# EAGLE board ratty (EAGLE 8.0.0)
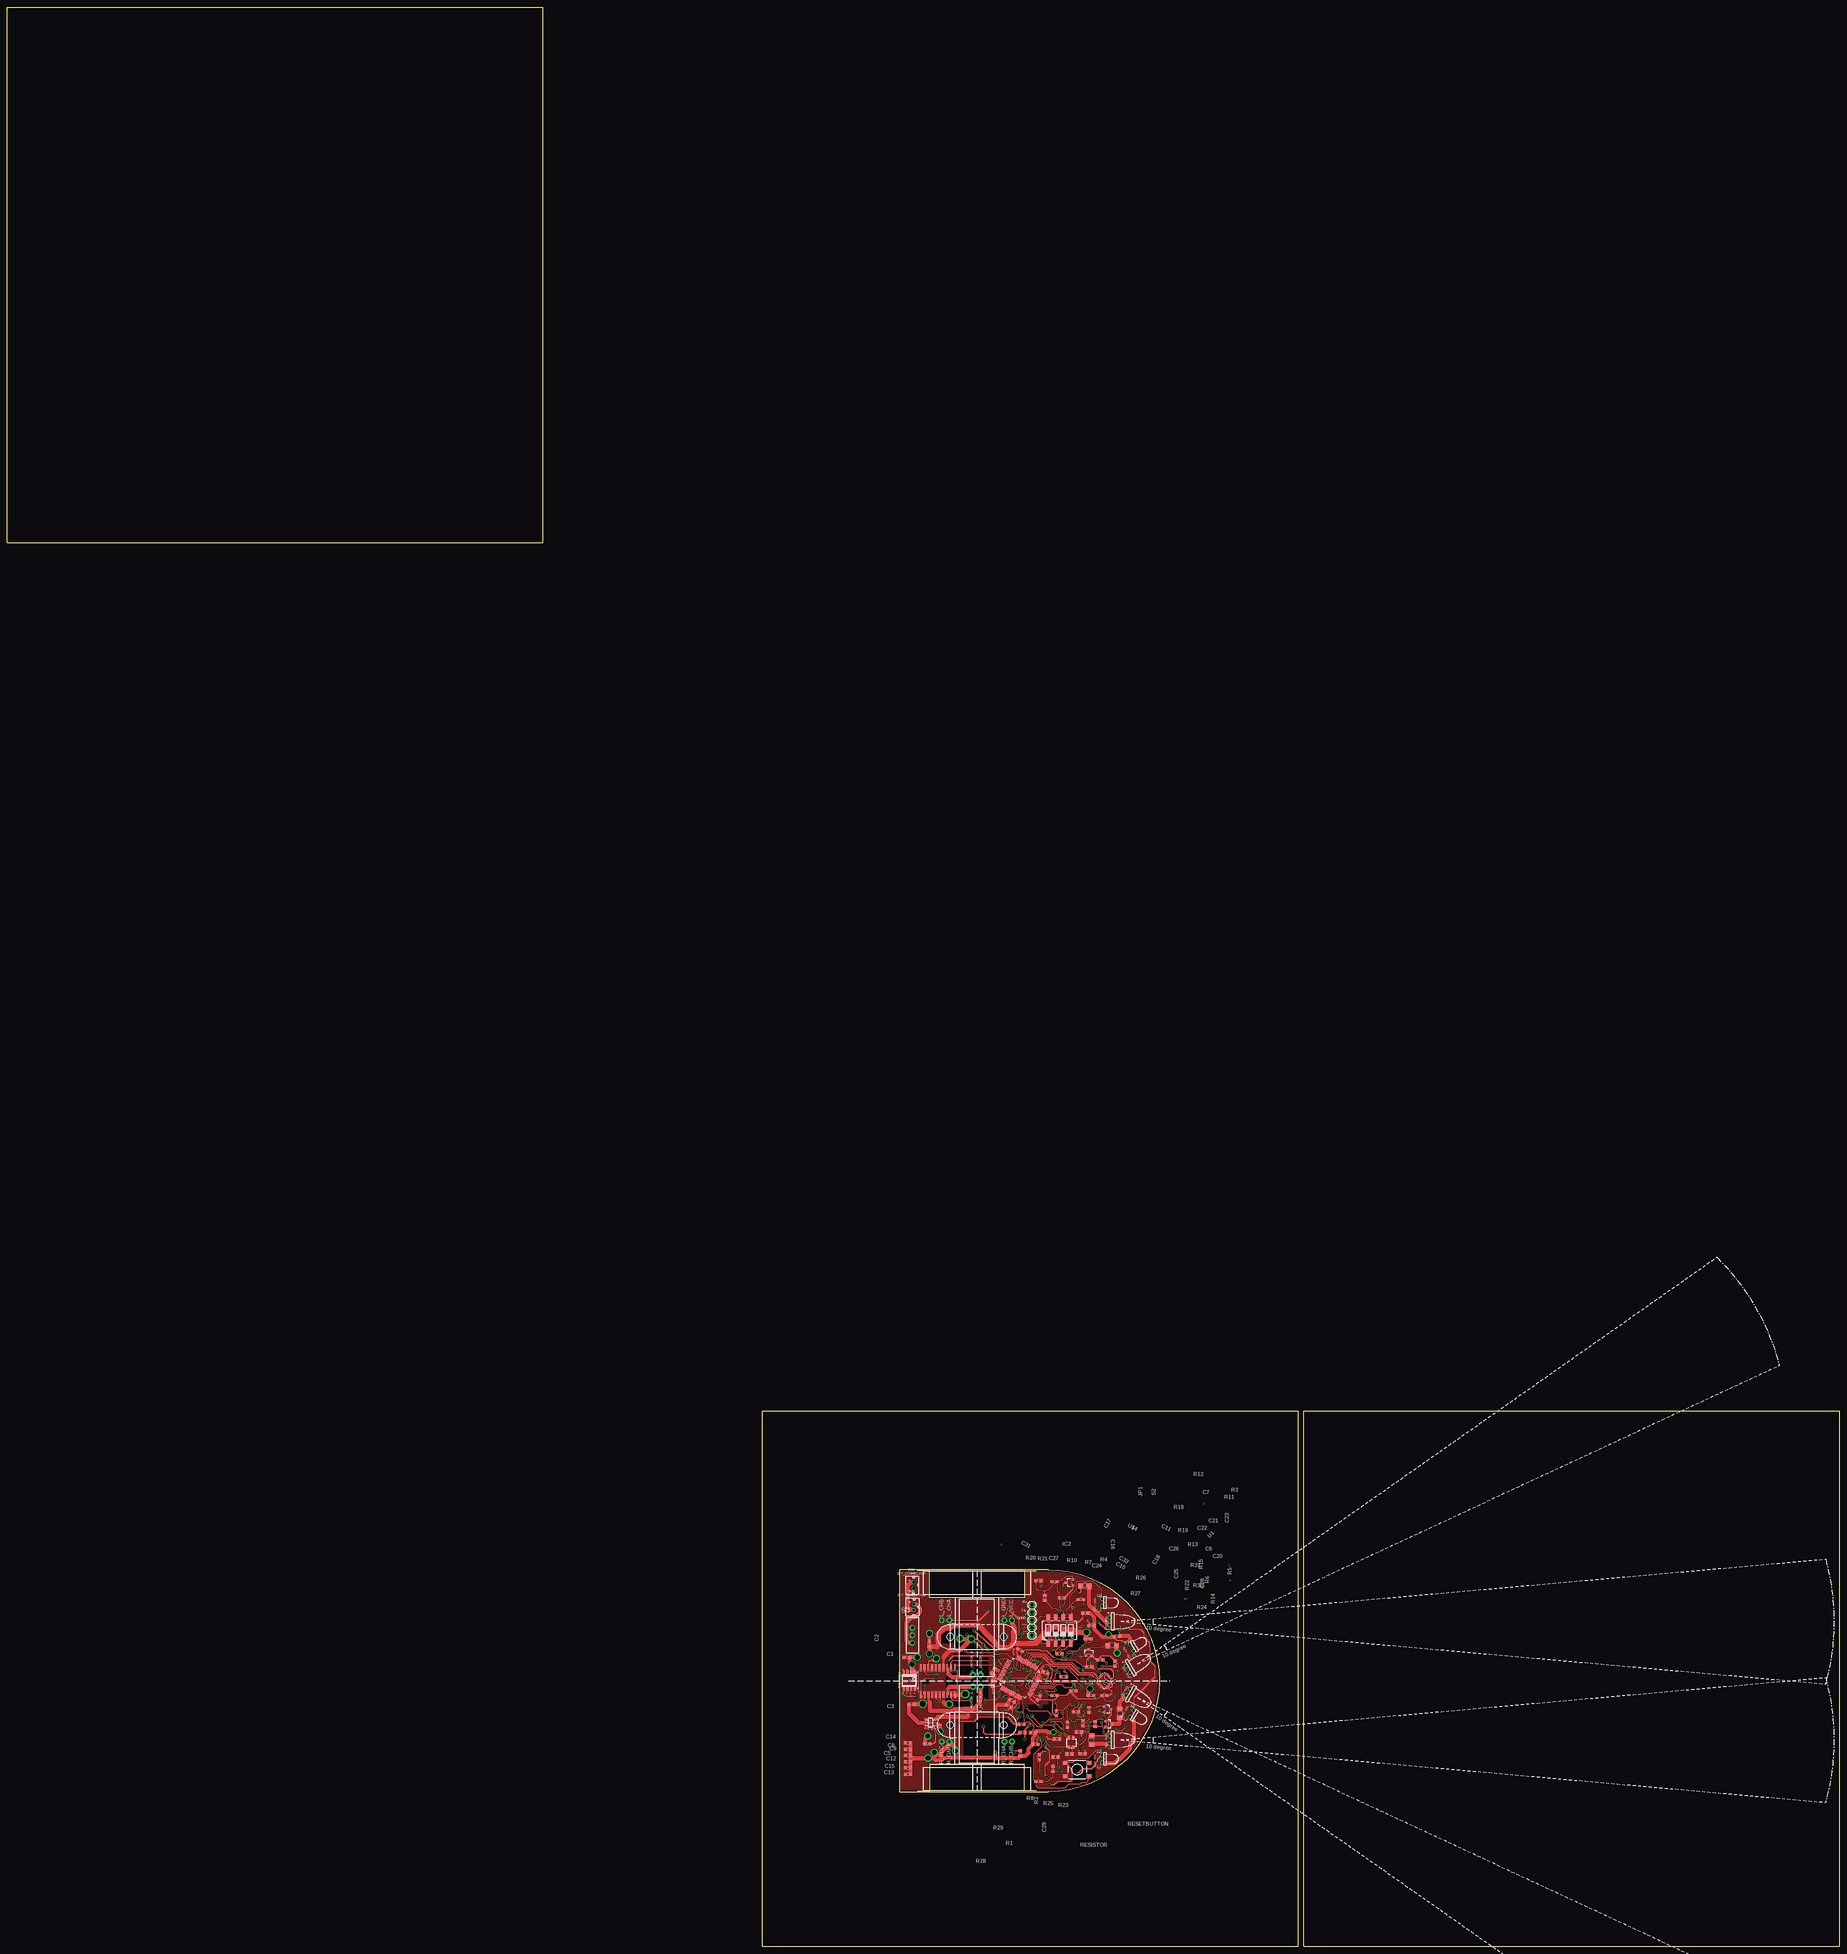
[diagram p0: board, top side]
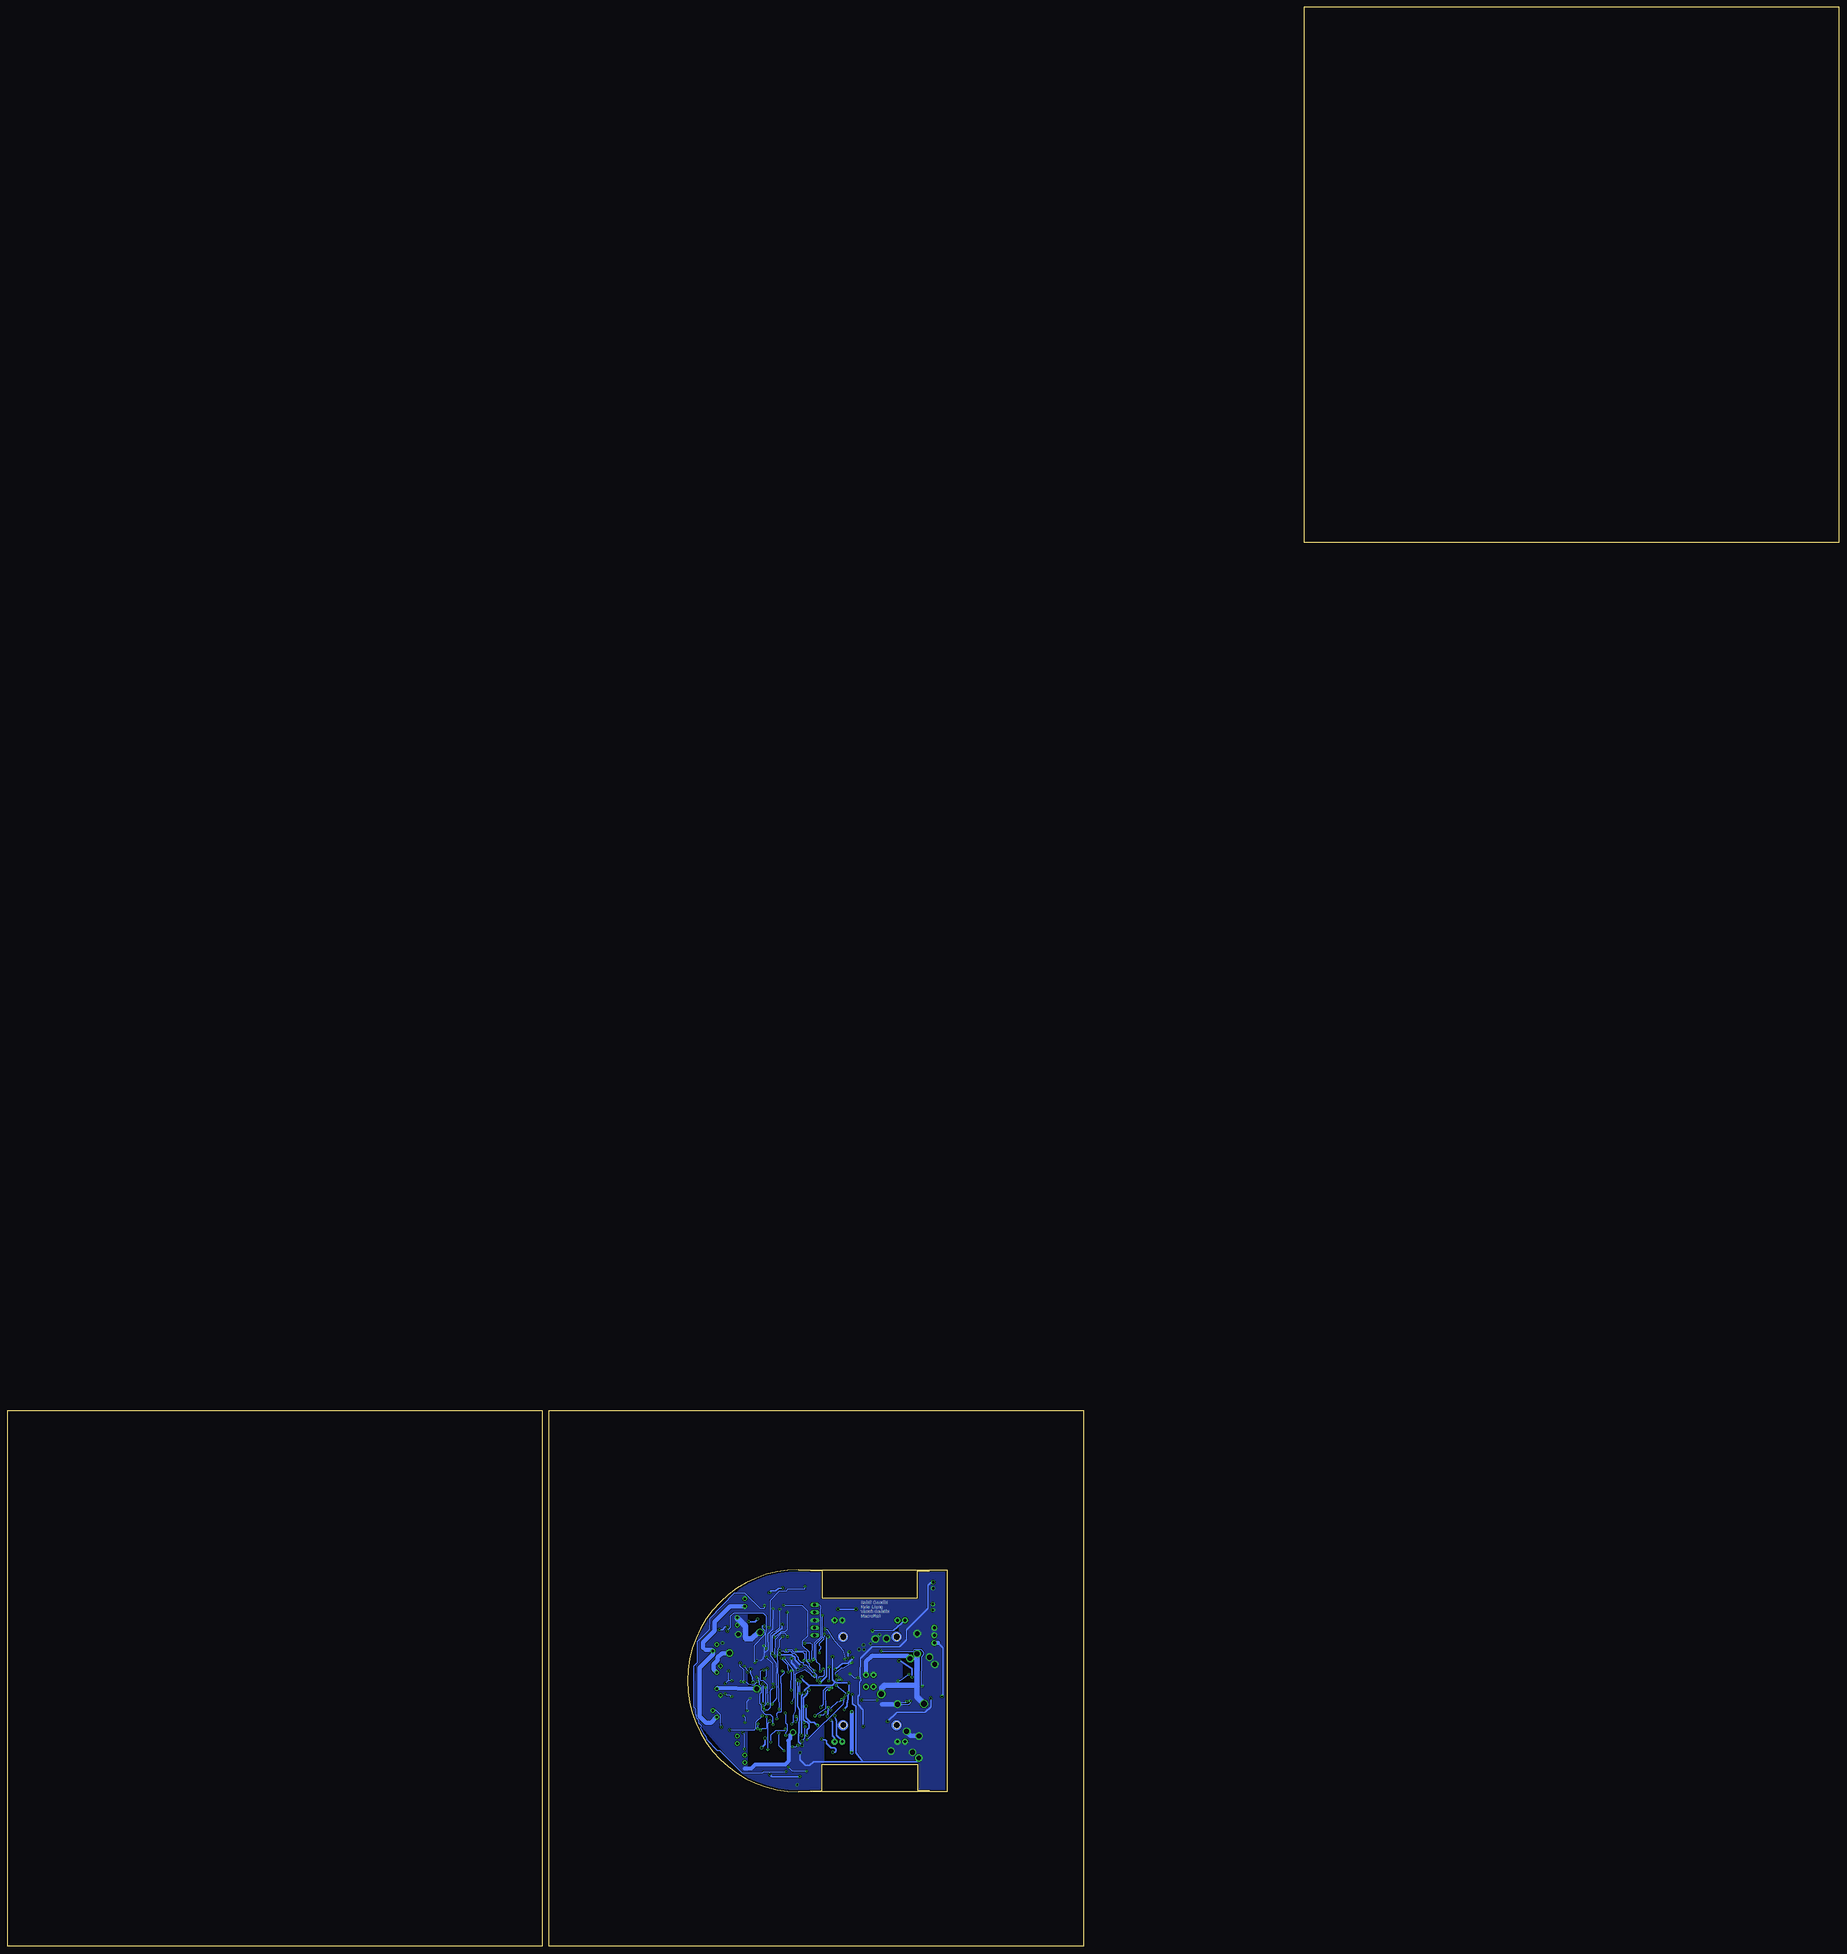
[diagram p1: board, bottom side, seen from below]

Size 616 x 652 mm. Coordinates in mm from the lower left corner, seen from the top.
Outline: 300,52 350,52 arc180 350,126.68 300,126.68 300,52
Outline: 0,472 180,472 180,652 0,652 0,472
Outline: 254,0 434,0 434,180 254,180 254,0
Outline: 436,0 616,0 616,180 436,180 436,0
Copper layers (1*16): Top 0.0356mm / dielectric 1.5011mm / Bottom 0.0356mm
Design rules "oshpark-2layer": minimum track width 6mil, minimum drill 13mil, track to track 6mil, track to pad 6mil, pad to pad 6mil, via to via 6mil, smd to smd 6mil, copper to edge 15mil, drill to drill 6mil, minimum pad ring 7mil, minimum via ring 7mil, stop-mask expansion 2.5mil, vias tented up to drill 0mil, thermal gap 10mil

## Footprints (pad centres in the part's own frame; a part is rotated, then mirrored left to right if it is on the bottom)
SPLITTER = smd 0.102 x 0.102: 1 0,0; 2 0,0
C0603 = smd 1.1 x 1: 1 -0.85,0; 2 0.85,0
SO20 = smd 0.6 x 2.2: 1 -5.715,-4.6; 2 -4.445,-4.6; 3 -3.175,-4.6; 4 -1.905,-4.6; 5 -0.635,-4.6; 6 0.635,-4.6; 7 1.905,-4.6; 8 3.175,-4.6; 9 4.445,-4.6; 10 5.715,-4.6; 11 5.715,4.6; 12 4.445,4.6; 13 3.175,4.6; 14 1.905,4.6; 15 0.635,4.6; 16 -0.635,4.6; 17 -1.905,4.6; 18 -3.175,4.6; 19 -4.445,4.6; 20 -5.715,4.6
1X05 = drill 1.016 long: 1 -5.08,0; 2 -2.54,0; 3 0,0; 4 2.54,0; 5 5.08,0
SOT23-3 = smd 0.8 x 0.9: 1 -0.95,-1; 2 0.95,-1; 3 0,1.1
R0603 = smd 1 x 1.1: 1 -0.85,0; 2 0.85,0
R1206 = smd 1.6 x 1.803: 1 -1.422,0; 2 1.422,0
DTSM-6 = smd 1.55 x 1.3: 1 -3.975,2.25; 2 3.975,2.25; 3 -3.975,-2.25; 4 3.975,-2.25
CTS-219-04 = smd 1.13 x 2.44: 1 -3.81,-4.3; 2 -1.27,-4.3; 3 1.27,-4.3; 4 3.81,-4.3; 5 3.81,4.3; 6 1.27,4.3; 7 -1.27,4.3; 8 -3.81,4.3
SWITCH-SPDT = drill 1.016 pad 1.88: 1 0,2.54; 2 0,0; 3 0,-2.54
QFN-24_ITG3200_1:1 = smd 0.889 x 0.279: 1 -2.076,1.301; 2 -2.076,0.775; 3 -2.076,0.25; 4 -2.102,-0.25; 5 -2.076,-0.775; 6 -2.076,-1.301; 13 2.076,-1.301; 14 2.076,-0.775; 15 2.076,-0.25; 16 2.076,0.25; 17 2.076,0.775; 18 2.076,1.301 | smd 0.279 x 0.889: 7 -1.301,-2.076; 8 -0.775,-2.076; 9 -0.25,-2.076; 10 0.25,-2.076; 11 0.775,-2.076; 12 1.301,-2.076; 19 1.301,2.076; 20 0.775,2.076; 21 0.25,2.076; 22 -0.25,2.076; 23 -0.775,2.076; 24 -1.301,2.076
JST_CONNECTOR_FEMALE = drill 0.889: + 0,1; - 0,-1
TPS76850(SOIC-8) = smd 0.55 x 1.5: EN(BAR) -0.635,-2.7; FB/NC -0.635,2.7; GND -1.905,-2.7; IN1 0.635,-2.7; IN2 1.905,-2.7; OUT1 0.635,2.7; OUT2 1.905,2.7; PG -1.905,2.7
LQFP64 = smd 0.3 x 1.6: 1 -3.75,-5.7; 2 -3.25,-5.7; 3 -2.75,-5.7; 4 -2.25,-5.7; 5 -1.75,-5.7; 6 -1.25,-5.7; 7 -0.75,-5.7; 8 -0.25,-5.7; 9 0.25,-5.7; 10 0.75,-5.7; 11 1.25,-5.7; 12 1.75,-5.7; 13 2.25,-5.7; 14 2.75,-5.7; 15 3.25,-5.7; 16 3.75,-5.7; 33 3.75,5.7; 34 3.25,5.7; 35 2.75,5.7; 36 2.25,5.7; 37 1.75,5.7; 38 1.25,5.7; 39 0.75,5.7; 40 0.25,5.7; 41 -0.25,5.7; 42 -0.75,5.7; 43 -1.25,5.7; 44 -1.75,5.7; 45 -2.25,5.7; 46 -2.75,5.7; 47 -3.25,5.7; 48 -3.75,5.7 | smd 1.6 x 0.3: 17 5.7,-3.75; 18 5.7,-3.25; 19 5.7,-2.75; 20 5.7,-2.25; 21 5.7,-1.75; 22 5.7,-1.25; 23 5.7,-0.75; 24 5.7,-0.25; 25 5.7,0.25; 26 5.7,0.75; 27 5.7,1.25; 28 5.7,1.75; 29 5.7,2.25; 30 5.7,2.75; 31 5.7,3.25; 32 5.7,3.75; 49 -5.7,3.75; 50 -5.7,3.25; 51 -5.7,2.75; 52 -5.7,2.25; 53 -5.7,1.75; 54 -5.7,1.25; 55 -5.7,0.75; 56 -5.7,0.25; 57 -5.7,-0.25; 58 -5.7,-0.75; 59 -5.7,-1.25; 60 -5.7,-1.75; 61 -5.7,-2.25; 62 -5.7,-2.75; 63 -5.7,-3.25; 64 -5.7,-3.75
TPS73633(SOT-23) = smd 0.55 x 1: EN 0.95,-1.35; GND 0,-1.35; IN -0.95,-1.35; NR/FB 0.95,1.35; OUT -0.95,1.35
RECEIVER = drill 0.8 pad 1.5: C 1.27,-0.5; E -1.27,-0.5
FUTURA_V1.0_MOTOT_MOUNT = drill 0.95 pad 2: L_CHA -20.375,26.73; L_CHB -20.375,24.19; L_GND -20.375,45.27; L_MOTOR_A -2,37.27; L_MOTOR_B -2,34.73; L_VCC -20.375,47.81; R_CHA 20.375,45.27; R_CHB 20.375,47.81; R_GND 20.375,26.73; R_MOTOR_A 2,34.73; R_MOTOR_B 2,37.27; R_VCC 20.375,24.19 | hole 2.286: 14.85,45; 14.85,27; -14.85,27; -14.85,45
EMITTER = drill 0.8 pad 1.5: + -1.27,-0.5; - 1.27,-0.5
LED-TRICOLOR-SMD = smd 0.7 x 1.2: A 0.7,-1.5; B 0.7,1.5; G -0.7,1.5; R -0.7,-1.5

## Placement (x,y rotation side)
A_SPLITTER  SPLITTER  [SPLITTER]  314.71,63.18 0 top
C1  1 uF  [C0603]  302.46,97.24 0 top
C2  10 uF  [C0603]  310.03,101.66 90 top
C3  0.1uF  [C0603]  303.99,81.41 180 top
C5  10 nF  [C0603]  309.35,68.08 180 top
C6  0.1uF  [C0603]  364.31,84.44 0 top
C7  4.7uF  [C0603]  363.45,103.44 0 top
C8  0.1uF  [C0603]  302.84,66.33 0 top
C9  4.7uF  [C0603]  302.84,64.24 0 top
C10  0.1uF  [C0603]  336.73,80.7 152 top
C11  0.1uF  [C0603]  349.07,92.13 334 top
C12  0.1uF  [C0603]  302.84,62.13 0 top
C13  4.7uF  [C0603]  302.84,57.92 0 top
C14  0.1uF  [C0603]  302.84,68.41 0 top
C15  4.7uF  [C0603]  302.84,60.03 0 top
C16  0.1uF  [C0603]  331.29,88.35 271 top
C17  0.1uF  [C0603]  331.55,92.69 61 top
C18  0.1uF  [C0603]  346.81,83.55 238.5 top
C20  10nF  [C0603]  368.91,84.49 180 top
C21  0.1uF  [C0603]  367.49,96.42 180 top
C22  0.1uF  [C0603]  363.73,93.96 180 top
C23  2.2nF  [C0603]  372.44,95.1 90 top
C24  0.1uF  [C0603]  360.99,116.77 0 top
C25  0.1uF  [C0603]  352.83,78.37 270 top
C26  4.7uF  [C0603]  352.1,84.46 0 top
C27  0.1uF  [C0603]  352.07,122.66 0 top
C28  0.1uF  [C0603]  361.62,75.09 270 top
C29  0.1uF  [C0603]  346.96,63.61 90 top
C31  4.7uF  [C0603]  340.54,99.65 332.9 top
C33  1uF  [C0603]  337.85,82.61 149.8 top
D_SPLITTER  SPLITTER  [SPLITTER]  312.22,62.59 0 top
IC2  L293DD  [SO20]  312.85,89.21 180.3 top
JP1  ConnectorPins  [1X05]  344.53,109.71 90 top
M_SPLITTER  SPLITTER  [SPLITTER]  313.61,64.45 0 top
Q1  MOSFET-NCHANNELBSS123LT1G  [SOT23-3]  370.28,74.73 270 top
Q2  MOSFET-NCHANNELBSS123LT1G  [SOT23-3]  357.23,122.38 90 top
Q3  MOSFET-NCHANNELBSS123LT1G  [SOT23-3]  363.63,98.84 0 top
Q5  MOSFET-NCHANNELBSS123LT1G  [SOT23-3]  369.85,79.74 270 top
R1  1.8K  [R0603]  345.72,67.95 0 top
R2  10K  [R0603]  351.61,59.65 90 top
R3  1.8K  [R0603]  373.08,104.22 0 top
R4  1.8K  [R0603]  364.59,107.91 180 top
R5  43  [R1206]  374.02,78.34 90 top
R6  47K  [R0603]  365.81,74.81 90 top
R7  43Ω  [R1206]  362.28,121.19 0 top
R8  100Ω  [R0603]  346.71,55.51 0 top
R10  47K  [R0603]  354.58,117.2 0 top
R11  43  [R1206]  371.4,101.17 0 top
R12  1.8K  [R0603]  362.48,112.07 180 top
R13  47K  [R0603]  358.47,85.91 0 top
R14  43  [R1206]  364.57,69.4 270 top
R15  47K  [R0603]  363.68,79.56 90 top
R18  100  [R0603]  353.75,98.43 0 top
R19  100  [R0603]  355.19,90.63 0 top
R20  100Ω  [R0603]  348.82,117.18 90 top
R21  10K  [R0603]  346.71,123.02 0 top
R22  100  [R0603]  356.49,74.56 270 top
R23  10K  [R0603]  352.88,69.7 180 top
R24  10K  [R0603]  361.52,64.75 0 top
R25  10K  [R0603]  352.45,63.66 180 top
R26  43K  [R0603]  341.05,74.66 0 top
R27  43K  [R0603]  341.38,71.94 180 top
R28  20K  [R0603]  344.88,71.94 0 top
R29  20K  [R0603]  340.61,64.85 90 top
R30  10k  [R0603]  360.27,72.09 0 top
R31  10k  [R0603]  359.39,78.9 0 top
RESETBUTTON  DTSM-6  [DTSM-6]  359.74,59.47 180 top
RESISTOR  680  [R0603]  357.12,64.67 180 top
S2  219-04  [CTS-219-04]  353.75,106.23 0 top
S3  [SWITCH-SPDT]  304.29,104.58 0 top
U1  ITG-32001:1  [QFN-24_ITG3200_1:1]  368.94,89.24 45 top
U$1  JST_CONNECTOR_FEMALE  [JST_CONNECTOR_FEMALE]  304.83,114.08 0 top
U$2  JST_CONNECTOR_FEMALE  [JST_CONNECTOR_FEMALE]  304.72,121.39 0 top
U$3  TPS76850(SOIC-8)  [TPS76850(SOIC-8)]  303.3,89.31 180 top
U$4  STM32F411XC  [LQFP64]  340.28,90.25 332.1 top
U$5  TPS73633(SOT-23)  [TPS73633(SOT-23)]  310.39,75.22 270 top
U$6  RECEIVER  [RECEIVER]  368.58,115.6 270 top
U$8  FUTURA_V1.0_MOTOR_MOUNT  [FUTURA_V1.0_MOTOT_MOUNT]  289.99,89.24 270 top
U$9  RECEIVER  [RECEIVER]  378.54,100.69 300 top
U$11  RECEIVER  [RECEIVER]  378.54,77.98 240 top
U$13  RECEIVER  [RECEIVER]  368.58,63.07 270 top
U$15  EMITTER  [EMITTER]  377.27,85.25 240 top
U$16  EMITTER  [EMITTER]  371.12,109.25 270 top
U$17  LED-TRICOLOR  [LED-TRICOLOR-SMD]  357.68,68.48 0 top
U$18  EMITTER  [EMITTER]  377.27,93.43 300 top
U$19  EMITTER  [EMITTER]  371.12,69.42 270 top

## Library data of the parts
A_SPLITTER D_SPLITTER M_SPLITTER = splitter
C1-C3 C5-C18 C20-C29 C31 C33 R5 R7 R8 R11 R14 R18 R19 R22-R31 RESISTOR = rcl
IC2 = st-microelectronics; OC_FARNELL: unknown
JP1 = pinhead
Q1-Q3 Q5 = transistors; PROD_ID: TRANS-08345
R1-R4 R6 R10 R12 R13 R15 R20 R21 = resistor
RESETBUTTON = switch-tact
S2 = switch-dil; OC_FARNELL: unknown; OC_NEWARK: unknown
S3 = SparkFun
U1 = SparkFun-Sensors; PROD_ID: IC-09685
U$1 U$2 = JST_CONNECTOR_FEMALE. through hole
U$3 = TPS76850(SOIC-8)
U$4 = stm32f411
U$5 = TPS73633(SOT-23)
U$6 U$9 U$11 U$13 U$15 U$16 U$18 U$19 = sfh4550 & teft4300
U$8 = Futura 1.0 motor mount template
U$17 = LEDs

## Nets
3.3V: C10.1 C11.1 C16.1 C17.1 C18.1 C22.1 C31.1 C33.1 R2.2 R21.2 R23.2 R24.2 R25.2 R30.2 R31.2 RESISTOR.2 U1.13 U$4.1 U$4.13 U$4.19 U$4.32 U$4.48 U$4.64 U$5.OUT
3.3V_NUCLEO: U$6.C U$9.C U$11.C U$13.C
5V: C2.1 C3.1 C6.1 C7.1 C8.1 C9.1 C12.1 C13.1 C14.1 C15.1 IC2.20 U$3.OUT1 U$3.OUT2 U$5.EN U$5.IN U$8.L_VCC U$8.R_VCC U$15.+ U$16.+ U$18.+ U$19.+
AGND: A_SPLITTER.2 C10.2 C33.2 R1.1 R3.1 R4.1 R12.1 R28.2 R29.1 U$4.12
BATTERY: C1.1 IC2.10 S3.2 U$3.IN1 U$3.IN2
BATTERY_1: R26.1 S3.3 U$1.+
BATTERY_2: R27.2 U$1.- U$2.+
BLUE_LED: U$4.9 U$17.B
DGND: C6.2 C7.2 C8.2 C9.2 C11.2 C12.2 C13.2 C14.2 C15.2 C16.2 C17.2 C18.2 C20.2 C21.2 C22.2 C23.2 C24.1 C25.2 C26.2 C27.2 C28.2 C29.2 C31.2 D_SPLITTER.2 JP1.3 Q1.2 Q2.2 Q3.2 Q5.2 R6.1 R10.1 R13.1 R15.1 RESETBUTTON.4 S2.5 S2.6 S2.7 S2.8 U1.9 U1.11 U1.12 U1.18 U$4.18 U$4.31 U$4.47 U$4.60 U$4.63
DIP_BUTTON_1: R22.1 S2.1 U$4.36
DIP_BUTTON_2: R19.1 S2.2 U$4.29
DIP_BUTTON_3: R18.1 S2.3 U$4.62
DIP_BUTTON_4: R20.1 S2.4 U$4.33
ENCODER1_1: U$4.21 U$8.L_CHA
ENCODER1_2: U$4.55 U$8.L_CHB
ENCODER2_1: U$4.14 U$8.R_CHA
ENCODER2_2: U$4.15 U$8.R_CHB
GND: A_SPLITTER.1 C1.2 C2.2 C3.2 C5.2 D_SPLITTER.1 M_SPLITTER.1 U$2.- U$3.EN(BAR) U$3.GND U$5.GND
GREEN_LED: U$4.10 U$17.G
GYROCLK: U1.1 U$4.42
GYROCPOUT: C23.1 U1.20
GYROREGOUT: C21.1 U1.10
GYROVLOGIC: C20.1 U1.8 U$4.20
HBRIDGE_EN1: IC2.1 U$4.56
HBRIDGE_EN2: IC2.11 U$4.57
I2CSCL_FOR_GYRO: R31.1 U1.23 U$4.41
I2CSDA_FOR_GYRO: R30.1 U1.24 U$4.40
L_DIGITAL_IN_1: IC2.2 U$4.59
L_DIGITAL_IN_2: IC2.9 U$4.61
LED/R5: R5.2 U$15.-
LED/R7: R7.2 U$16.-
LED/R11: R11.2 U$18.-
LED/R14: R14.2 U$19.-
LEFT_BACK: IC2.8 U$8.L_MOTOR_A
LEFT_FORWARD: IC2.3 U$8.L_MOTOR_B
MGND: IC2.4 IC2.5 IC2.6 IC2.7 IC2.14 IC2.15 IC2.16 IC2.17 M_SPLITTER.2 U$8.L_GND U$8.R_GND
N$1: RESISTOR.1 U$17.A
N$2: C24.2 R2.1 R8.2
N$13: JP1.1 U$4.46
N$14: JP1.2 U$4.49
N$16: C26.1 U$4.30
NRST_CIRCUIT_MCU: R8.1 RESETBUTTON.1 U$4.7
PA_6_REC_CIRCUIT_2: R3.2 U$4.22 U$9.E
PA_7_REC_CIRCUIT_1: R1.2 U$4.23 U$6.E
PB13_EMIT_CIRCUIT_1: Q1.1 R6.2 U$4.34
PB14_EMIT_CIRCUIT_2: Q2.1 R10.2 U$4.35
PB_0_EMIT_CIRCUIT_3: Q3.1 R13.2 U$4.26
PB_1_EMIT_CIRCUIT_4: Q5.1 R15.2 U$4.27
PC4_REC_CIRCUIT_3: R4.2 U$4.24 U$11.E
PC5_REC_CIRCUIT_4: R12.2 U$4.25 U$13.E
PC6_TX_PIN: JP1.4 U$4.37
PC7_RX_PIN: JP1.5 U$4.38
R_DIGITAL_IN_1: IC2.19 U$4.43
R_DIGITAL_IN_2: IC2.12 U$4.44
RED_LED: U$4.8 U$17.R
RIGHT_BACK: IC2.13 U$8.R_MOTOR_B
RIGHT_FORWARD: IC2.18 U$8.R_MOTOR_A
TO_C5_CAP: C5.1 U$5.NR/FB
TO_Q1_MOS: Q1.3 R5.1
TO_Q2_MOS: Q2.3 R7.1
TO_Q3_MOS: Q3.3 R11.1
TO_Q5_MOS: Q5.3 R14.1
TO_R18/C25: C25.1 R18.2 R23.1
TO_R19/C28: C28.1 R19.2 R24.1
TO_R20/C27: C27.1 R20.2 R21.1
TO_R22/C29: C29.1 R22.2 R25.1
VOLTAGE_BATTERY_1: R26.2 R28.1 U$4.16
VOLTAGE_BATTERY_2: R27.1 R29.2 U$4.17

## Tracks (layer width: path | path; a pad name or v marks a point on that pad's centre or on a via)
3.3V  (via drill 0.41, 0.6, 0.61)
  Top 0.305: 339.01,83.14 U$4.13 339.62,84.16 | 347.08,91.07 U$4.32 347.08,91.2 347.19,91.55 | U1.13 371.88,90.3 | 345.52,84.49 344.81,84.74 U$4.19 | v333.17,85.33 333.71,85.86 U$4.1 | U$4.48 339.64,97.99 339.73,98.08 | v347.75,121.06 347.56,121.25 | C22.1 364.58,95.04 364.57,95.05 v364.59,95.33 | v360,107.27 361.14,107.27 361.14,107.35 v361.49,107.7 | R31.2 360.24,77.54 360.55,77.22 360.68,77.22 v360.71,77.2 | v362.74,72.73 362.74,72.22 362.59,72.07 361.15,72.07 R30.2 | R25.2 351.55,63.61 | 356.29,64.69 RESISTOR.2 | 362.38,64.74 R24.2 | U$4.64 332.33,90.2
  Top 0.508: 339.01,83.14 C33.1 arc-12 C10.1 336.48,79.31 v334.62,79.64 | 371.88,90.3 371.88,92.39 370.99,93.28 v366.14,93.28 365.26,93.28 C22.1 | C31.1 340.11,99.68 | 345.52,84.49 C18.1 347.26,84.58 v348.16,85.27 | v349,90.68 348.67,91.4 348.64,91.8 348.21,92.2 C11.1 347.19,91.55 | v333.07,88.47 332.35,89.2 C16.1 331.26,90.01 331.27,90.02 331.77,90.02 331.85,90.2 332.33,90.2 | R23.2 350.27,69.7 v349,70.97 | v338.56,97.34 338.12,99.47 338.46,100.01 339.61,99.93 C31.1 | 339.73,98.08 339.39,98.99 C31.1 | R24.2 362.41,64.79 v362.41,66.76 | v361.21,69.96 361.12,70.05 R30.2 | R31.2 360.43,79.09 360.43,80.02 360.96,80.55 360.96,81.08 361.32,81.44 361.67,81.44 v361.87,81.64 | v361.93,88.19 362.28,88.53 362.71,88.53 362.97,88.32 365.15,88.32 v365.25,88.73
  Top 1.016: 312.27,76.54 312.11,76.54 U$5.OUT
  Top 1.524: C17.1 331.85,90.2 | 312.27,76.54 312.98,77.25 322.61,77.25 322.94,77.58
  Bottom 0.305: v347.75,121.06 347.75,120.15 347.78,120.17 353.49,120.17 354.05,119.61 356.29,119.61 359.46,116.44 359.46,107.8 v360,107.27 | v364.59,95.33 364.67,95.64 364.85,95.74 364.85,101.3 361.37,104.78 361.34,106.28 362.23,107.17 362.25,107.55 362.1,107.7 v361.49,107.7 | v360.71,77.2 360.71,73.46 360.94,73.23 362.23,73.23 v362.74,72.73
  Bottom 0.508: v338.56,97.34 338.56,89.69 337.63,88.77 | 337.63,88.77 337.44,88.58 333.17,88.58 v333.07,88.47 333.07,86.16 v333.17,85.33 333.45,82.07 333.63,81.9 333.63,80.68 v334.62,79.64 | 346.15,87.74 348.01,86.04 v348.16,85.27 349,84.33 v349,70.97 | 346.15,87.74 338.51,87.74 337.63,88.77 | 346.15,87.74 346.86,87.89 348.62,89.64 v349,90.68 | v362.41,66.76 361.21,67.95 v361.21,69.96 | v361.87,81.64 361.9,88.07 v361.93,88.19 | v365.25,88.73 365.48,90.48 366.09,91.75 366.09,93.22 v366.14,93.28
  pour Top (rank 4, no thermals): 320.8,126.63 366.32,126.63 366.32,52.3 320.8,52.3
3.3V_NUCLEO
  Top 1.524: U$13.C 368.38,61.5 372.21,61.5 373.61,62.9 373.91,62.9 377.47,66.45 377.47,68.03 378.79,69.35 378.79,75.81 U$11.C
  Bottom 1.524: U$6.C 373.05,114.33 378.23,109.15 378.23,106.1 382.09,102.24 382.09,100.46 381.31,99.68 379.07,99.68 U$9.C 378.74,98.23 383.24,93.73 383.24,77.3 381.13,75.19 379.41,75.19 U$11.C
5V  (via drill 1.63, 1.88)
  Top 0.508: 308.95,74.17 U$5.EN
  Top 1.524: U$8.L_VCC 337.8,108.8 338.38,107.82 | v362.89,105.62 362.6,105.33 362.31,105.62 | C6.1 363.46,86.33 v364.01,86.59 | 310.03,98.15 v310.08,98.33 | 321.95,84.64 v322.12,84.82 | 307.62,81.41 v307.77,81.57 | 310.07,100.77 C2.1
  Top 1.549: C3.1 307.62,81.41
  Top 1.575: IC2.20 321.95,84.64
  Top 1.651: C2.1 310.03,98.15 | 312.57,100.77 310.07,100.77
  Top 1.778: 362.6,105.33 C7.1 | 312.57,100.77 313.16,101.35 313.16,105.06 315.29,107.19 317.12,107.19 318.08,107.96 326.42,108.06 333.71,100.44 336.86,100.44 338.33,102.04 | 362.31,105.62 359.18,105.62 358.37,106.43 354.81,106.43 353.85,107.4 351.23,107.4 345.69,101.86 338.81,101.86 338.33,102.04 | 338.33,102.04 338.33,105.44 338.56,105.67 338.38,107.82
  Bottom 1.524: 367.79,103.54 367.59,103.33 | v362.89,105.62 363.42,105.62 | v364.01,86.59 377.19,86.87 U$15.+ | 367.84,105.19 367.79,105.24 | 310.11,87.76 310.06,87.71
  Bottom 1.778: U$16.+ 367.79,107.69 367.79,105.24 367.79,103.54 | 367.59,103.33 365.71,103.33 363.42,105.62 | v310.08,98.33 310.06,87.71 310.06,83.85 v307.77,81.57 | v322.12,84.82 322.12,86.75 321.11,87.76 310.11,87.76
  pour Top (rank 2, no thermals): 366.27,123.58 388.42,123.58 388.42,53.24 366.27,53.24
  pour Top (rank 2, no thermals): 300.1,88.19 321.16,88.19 321.16,52.33 300.1,52.33
AGND  (via drill 0.6, 1.37)
  Top 0.305: 338.4,83.44 338.79,83.67 U$4.12 | 345.03,67.79 R1.1 344.88,67.96
  Top 0.508: C33.2 338.4,83.44 | 340.02,63.41 R29.1 | 315.55,63.41 A_SPLITTER.2 | 371.37,104.22 R3.1 372.23,103.7 373.05,102.88 374.65,102.88 v375.51,102.01
  Top 1.27: C33.2 C10.2 332.96,81.1 332.11,80.22 v332.11,78.82 | 332.06,63.41 340.02,63.41 | 332.06,63.41 315.55,63.41 | 371.37,104.22 v370.23,104.98 | v332.11,65.21 332.11,63.45 332.06,63.41 | R29.1 342.28,64 343.41,65.13 343.41,66.49 R1.1 344.87,70.2 345.57,70.9 345.57,71.78 R28.2 345.73,72.08 346.13,72.47 349.5,72.47 350.04,71.94 v351.76,71.94 | R12.1 364.06,112.07 365.35,110.78 365.35,107.99 R4.1 365.44,106.75 368.07,104.12 372.12,104.12 R3.1
  Bottom 1.27: v332.11,78.82 v332.11,65.21 | v351.76,71.94 351.87,71.94 352.78,71.03 352.78,69.88 353.42,69.25 353.42,62.16 354.51,61.07 364.57,61.07 365.89,59.75 368.07,59.75
  pour Bottom (no thermals): 367.18,122.59 383.54,106.41 385.47,77.4 367.18,56.01
BATTERY
  pour Top (rank 3, no thermals): 300.1,126.37 321.51,126.37 321.41,88.35 300,88.35
BATTERY_1  (via drill 0.6)
  Top 0.508: 340.15,74.61 338.58,74.61 336.27,77.15 326.59,76.97 325.2,75.7 v320.09,75.7 | v301.73,84.03 304.9,84.03 v305.51,83.42
  Top 1.524: U$1.+ 305.71,115.08 306.88,113.9 306.88,112.33 305.18,110.62 303.96,110.62 302.31,108.97 302.31,102.8 303.07,102.04 S3.3 | 340.15,74.61 R26.1
  Bottom 0.508: 317.03,78.56 316.76,78.77 | 317.03,78.56 v320.09,75.7 | 303.07,102.04 301.35,100.31 301.35,84.41 v301.73,84.03 | v305.51,83.42 305.51,80.6 307.37,78.75 316.85,78.75 317.03,78.56
  Bottom 1.524: 303.07,102.04 S3.3
BATTERY_2  (via drill 0.6)
  Top 0.508: R27.2 339.84,71.25 329.06,71.25 328.27,72.04 328.22,72.09 v328.22,73.97
  Top 1.524: U$2.+ 303.9,122.39 302.72,121.22 302.72,114.23 303.86,113.09 304.82,113.09 U$1.-
  Bottom 0.508: v328.22,73.97 328.25,79.53 330.05,81.34 330.05,84.03 329.51,84.56 329.51,88.81 328.88,89.44 329.26,91.01 329.11,96.88 325.25,100.74 316.05,100.74 313.69,103.1 313.69,106.46 306.5,113.65 306.5,121.32 305.43,122.39 U$2.+
  Bottom 1.524: 304.77,122.43 U$2.+
BLUE_LED  (via drill 0.41, 0.6)
  Top 0.305: v342.52,80.4 343.71,79.2 349.81,79.2 350.82,78.19 v350.82,77.27 | U$4.9 338.28,85.96 v338.84,86.92 | U$17.B 358.34,70.08 358.34,70.8 358.17,70.92 356.08,70.92 355.12,72.04 355.12,74.58 354.1,75.6 v350.88,75.6
  Bottom 0.305: v342.52,80.4 342.52,80.42 341.78,81.16 341.78,85.93 340.56,87.15 339.27,87.18 v338.84,86.92 | v350.82,77.27 350.42,76.87 350.42,76.05 v350.88,75.6
DGND  (via drill 0.41, 0.6, 0.61, 1.63)
  Top 0.305: U$4.63 334.6,89.59 334.82,89.36 334.82,88.83 336.09,88.83 | C31.2 341.8,99.57 | v368.17,66.38 367.72,65.92 365.99,65.92 363.19,63.12 359.61,63.12 358.21,61.72 RESETBUTTON.4 | v368.71,71.89 368.71,73.21 368.81,73.31 | 368.81,73.31 Q1.2 | 368.16,73.96 R6.1 361.9,73.96 C28.2 363.68,76.3 R15.1 | 368.16,73.96 368.81,73.31 | v368.48,77.5 368.85,77.87 Q5.2 367.78,78.79 v367.23,79.33 | v368,75.32 368,74.12 368.16,73.96 | C6.2 365.3,84.8 365.3,83.93 365.81,83.42 v366.24,83.42 366.99,83.42 C20.2 368.06,84.04 369.47,82.63 371.45,82.63 372.21,83.39 372.21,83.72 v372.42,83.93 | C24.1 359.69,116.77 357.86,114.94 357.86,114.23 357.86,110.83 S2.5 S2.6 | R10.1 353.74,114.42 354.18,113.98 354.18,113.39 355.14,112.43 355.14,110.66 S2.6 | S2.6 S2.7 352.41,110.6 350.01,110.6 S2.8 349.56,110.9 347.4,110.9 346.2,109.71 JP1.3 | 352.55,77.24 C25.2 | 344.91,84.03 344.6,84.28 U$4.18 | 347.95,89.9 U$4.31 | 340.59,97.95 340.54,97.8 U$4.47 339.37,95.36 339.37,94.45 v339.6,93.94 | C22.2 361.85,93.96 360.4,95.41 359.92,95.41 359.21,96.12 354.51,96.12 353.87,96.75 v352.3,96.75 352.32,96.73 | 364.58,103.16 364.58,102.53 364.11,102.06 362.59,102.06 v361.62,101.1 | v363.98,96.12 364.58,96.56 Q3.2 | v373.56,92.56 373.56,94.84 C23.2 | v374.57,84.94 v374.57,88.4 | v339.8,89.29 339.14,88.83 336.32,88.83 | 336.32,88.83 336.09,88.83 | v372.42,89.34 372.19,89.11 372.19,88.47 372.14,88.42 371.65,88.42 371.59,88.42 U1.12 U1.11 | 368.91,90.89 368.91,91.05 U1.18 | 333.15,92.82 333.43,92.16 333.48,91.85 U$4.60 335.31,90.91 v336.27,90.3 336.32,88.83 | 336.12,88.85 336.09,88.83 | U1.9 370.79,87.1 | U1.11
  Top 0.406: Q2.2 358.23,124.43 358.17,124.49 355.88,124.49 354.13,122.74 353,122.74 C27.2 352.92,119.5 353.7,118.73 353.7,117.24 R10.1 | v358.57,113.49 358.57,114.13 358.47,114.23 357.86,114.23
  Top 0.508: 334.82,88.83 333.49,87.5 C16.2 331.31,85.34 331.77,84.87 331.77,84.82 v331.9,84.69 | 344.91,84.03 C18.2 351.46,82.82 | C22.2 362.88,96.14 Q3.2 365.99,96.42 C21.2 366.68,96.42 367.87,97.62 370.78,97.62 C23.2 | 364.58,103.16 C7.2 | 351.46,82.82 352.08,82.82 352.91,83.65 352.91,84.42 C26.2 356.17,84.46 R13.1 357.62,85.46 359.79,83.27 366.12,83.27 v366.24,83.42 | C25.2 352.36,77.52 351.36,78.52 351.36,82.72 351.46,82.82 | 347.95,89.9 348.21,89.72 349.33,89.74 349.94,90.33 C11.2 349.94,92.87 v350.24,93.1 | 341.8,99.57 342.52,99.68 347.22,99.68 347.47,99.42 349.63,99.42 v352.3,96.75 | 340.59,97.95 C31.2 | U1.12 370.58,89.17 368.91,90.18 368.91,90.89 | C29.2 347.08,64.46 348.18,65.56 349,65.56 v349.48,65.08 | 370.79,87.1 371.12,87.08 371.65,87.61 371.65,88.42 | RESETBUTTON.4 357.91,59.57 357.91,55.81 357.66,55.56 353.21,55.56 351.99,54.34 v350.37,54.34
  Top 1.524: C13.2 C15.2 C12.2 303.69,63.15 | 303.69,63.15 C9.2 C8.2 C14.2 | 333.15,92.82 C17.2 | D_SPLITTER.2 311.51,63.3 v309.58,63.3 303.85,63.3 303.69,63.15
  Bottom 0.305: v368.17,66.38 368.17,71.36 v368.71,71.89 | v368.48,77.5 368.45,77.5 367.97,77.02 367.97,75.34 v368,75.32 | v367.23,79.33 367.23,82.43 v366.24,83.42 | v361.62,101.1 361.62,98.51 | 361.62,98.51 361.62,97.41 361.93,97.11 361.93,96.75 362.69,95.99 v363.98,96.12 | v374.57,88.4 373.56,89.41 | 373.56,89.41 v373.56,92.56 | v372.42,83.93 372.54,83.93 373.02,84.41 374.04,84.41 v374.57,84.94 | v358.57,113.49 358.65,106.56 360.38,104.96 360.15,99.78 361.62,98.51 | v372.42,89.34 372.49,89.41 373.56,89.41 | v339.6,93.94 339.8,93.48 v339.8,89.29
  Bottom 0.508: v352.3,96.75 352.3,95.41 v350.24,93.1 | v331.9,84.69 331.9,81.57 330.66,80.75 330.66,65 328.22,62.13 | v349.48,65.08 349.48,62.77 347.57,60.87 346.23,60.87 344.96,62.13 328.22,62.13 | v309.58,63.3 309.58,62.67 310.11,62.13 328.22,62.13
  Bottom 1.524: v309.58,63.3 309.68,63.3
  pour Bottom (rank 3, no thermals): 341.33,126.6 367.11,126.6 367.11,52.46 341.33,52.46
DIP_BUTTON_1  (via drill 0.41)
  Top 0.305: v347.9,101.94 349.13,101.94 349.14,101.93 S2.1 349.94,103 351.92,104.98 354.41,104.98 v355.27,104.12 | R22.1 v356.51,79.79 | U$4.36 345.47,95.26 345.59,95.38 v345.69,95.92
  Bottom 0.305: v355.27,104.12 356.49,102.9 356.49,100.51 357.05,99.95 357.12,98.94 357.2,98.66 v356.51,79.79 | v347.9,101.94 345.69,101.94 345.47,101.71 345.62,97.24 v345.69,95.92
DIP_BUTTON_2  (via drill 0.41, 0.6)
  Top 0.305: R19.1 354.1,91.57 v353.42,92.26 353.14,92.26 352.3,91.42 352.3,90.25 350.57,88.22 347.95,88.22 347.4,89.01 U$4.29 | v355.8,96.91 356.34,96.91 v357.89,97.59 | v353.67,104.15 352.75,102.41 S2.2
  Bottom 0.305: v353.42,92.26 353.49,94.49 v355.8,96.91 | v357.89,97.59 357.76,103.31 355.83,105.24 354.58,105.24 353.67,104.32 v353.67,104.15
DIP_BUTTON_3  (via drill 0.41)
  Top 0.305: R18.1 352.53,99.16 352.53,99.68 352.55,99.7 | 352.55,99.7 352.79,99.7 S2.3 | v350.8,99.62 350.88,99.7 352.55,99.7 | v344.48,92.54 341.96,90 341.88,90.08 337.72,90.08 v337.21,89.57 | v335.48,89.59 335.41,89.59 335,89.95 U$4.62
  Bottom 0.305: v350.8,99.62 350.62,99.45 347.7,99.45 347.45,99.19 347.45,95.94 346.43,94.93 346.43,94.42 344.63,92.62 v344.48,92.54 | v337.21,89.57 335.51,89.62 v335.48,89.59
DIP_BUTTON_4  (via drill 0.41)
  Top 0.305: v354.05,99.68 355.3,99.68 S2.4 358.47,102.84 v358.17,103.97 | U$4.33 346.84,94.57 348.24,95.97 v348.16,96.12 | R20.1 351.45,113.7 352.53,113.7 353.8,112.43 v353.8,112.38
  Bottom 0.305: v354.05,99.68 352.22,99.68 351.41,98.86 348.49,98.86 347.93,98.3 347.93,96.68 348.06,96.55 348.06,96.32 v348.16,96.12 | v353.8,112.38 353.82,112.35 353.82,106.48 354.46,105.85 355.93,105.85 357.58,104.25 357.89,104.25 v358.17,103.97
ENCODER1_1  (via drill 0.6)
  Top 0.305: U$4.21 343.49,86.57 343.23,86.57 342.34,87.46
  Top 0.508: U$8.L_CHA 326.9,109.61 v330.61,113.32 | v342.8,88.7 342.34,87.46 | v336.68,113.32 340.11,109.89 v340.11,104.12
  Bottom 0.508: v342.8,88.7 340.59,90.73 340.59,103.74 340.49,103.74 v340.11,104.12 | v330.61,113.32 v336.68,113.32
ENCODER1_2  (via drill 0.6)
  Top 0.305: U$4.55 334.62,94.14 334.34,94.9
  Top 0.508: v325.12,106.15 330.38,101.43 330.5,101.38 v332.94,98.94 | 334.34,94.9 333.86,95.28 333.43,95.71 v333.4,96.93
  Bottom 0.508: U$8.L_CHB 318.05,106.2 v325.12,106.15 | v332.94,98.94 333.38,98.46 v333.4,96.93
ENCODER2_1  (via drill 0.6)
  Top 0.305: U$4.14 339.6,83.01 339.62,82.4 339.6,81.62 | 338.46,79.97 338.38,79.89
  Top 0.508: 339.6,81.62 338.46,79.97 | 338.38,79.89 338,79.2 v337.8,77.55
  Bottom 0.508: v337.8,77.55 337.19,75.6 337.19,70.97 335.26,69.05 U$8.R_CHA
ENCODER2_2  (via drill 0.41, 0.6)
  Top 0.305: U$4.15 340.11,82.94 340.08,82.73 340.13,82.61 340.13,82.17 340.18,81.69 340.23,81.26 v339.93,80.35
  Top 0.508: v340.28,77.38 v339.14,76.08
  Bottom 0.508: v339.93,80.35 v340.28,77.38 | v339.14,76.08 338.61,75.55 338.61,70.87 337.8,70.07 U$8.R_CHB
GND  (via drill 1.63)
  Top 0.508: 313.56,63.2 M_SPLITTER.1 313.61,64.27 | 308.99,75.27 U$5.GND | U$3.GND 305.18,92.04 | U$5.GND 312.85,75.22 313.56,74.5 | 307.6,75.19 U$5.GND
  Top 1.27: D_SPLITTER.1 A_SPLITTER.1 313.61,64.27
  Top 1.397: C2.2 v310.03,105.19
  Top 1.524: 308.46,68.04 C5.2 308.5,69.74 v309.5,70.75 | U$3.GND U$3.EN(BAR) 304.17,92.24 v304.17,94.88 303.31,95.91 C1.2 v305.94,97.24 | 313.56,74.5 313.56,72.34 v313.61,72.3 | M_SPLITTER.1 312.47,64.45 v311.68,65.23 | C3.2 303.14,78.43 306.38,75.19 307.6,75.19
  Bottom 1.524: v313.61,72.3 313.61,72.09 312.27,70.75 v309.5,70.75 309.4,70.64
  pour Bottom (no thermals): 300,126.8 316.15,126.8 316.15,52 300,52
GREEN_LED  (via drill 0.41, 0.6)
  Top 0.305: U$4.10 338.86,85.93 339.01,86.11 v339.75,86.39 | v344.48,77.58 344.48,77.4 347.22,74.56 351.31,74.56 353.82,72.04 354.31,72.04 355.88,70.47 356.55,70.47 U$17.G
  Bottom 0.305: v344.48,77.58 340.84,79.81 341,85.53 340.33,86.21 v339.75,86.39
GYROCLK  (via drill 0.41)
  Top 0.305: U$4.42 342.75,96.58 342.72,96.91 343.71,98.71 348.79,98.69 352.05,95.51 357.96,95.51 360.05,93.43 v360.45,93.43 | v361.42,90.12 365.29,89.72 U1.1
  Bottom 0.305: v361.42,90.12 360.94,90.84 360.94,92.94 v360.45,93.43
GYROCPOUT  (via drill 0.41, 0.51)
  Top 0.305: U1.20 v367.03,92.26 | v368.15,94.16 368.31,94.25 C23.1
  Bottom 0.305: v367.03,92.26 367.28,93.2 368.1,94.01 v368.15,94.16
GYROREGOUT  (via drill 0.41)
  Top 0.305: U1.10 369.95,88.4 v369.27,89.01 | v369.57,95.28 368.34,96.21 C21.1
  Bottom 0.305: v369.27,89.01 368.33,89.64 368.33,92.97 369.6,94.24 v369.57,95.28
GYROVLOGIC  (via drill 0.41)
  Top 0.305: 370.64,86.44 370.63,86.44 U1.8 369.83,87.22 369.34,87.71 369.09,87.89 v368.17,88.91 | v363.83,89.16 360.91,89.03 356.67,93.43 353.26,93.43 v352.38,92.64 | U$4.20 345.36,85.05 346.91,85.33 347.73,86.14 348.95,86.24 349.38,85.81 352.15,85.81 352.32,85.98 v352.43,86.19
  Top 0.508: C20.1 370.76,84.49 371.37,85.1 371.37,85.7 370.63,86.44
  Bottom 0.305: v352.43,86.19 v352.38,92.64 | v363.83,89.16 364.11,88.91 365,87.76 365.68,87.76 366.09,87.92 366.75,88.14 367.46,88.85 v368.17,88.91
HBRIDGE_EN1
  Top 0.305: IC2.1 319.26,94.56 arc-45 319.48,94.65 332.36,94.65 333.01,94.35 arc45 333.2,94.27 333.93,93.91 U$4.56
HBRIDGE_EN2  (via drill 0.61)
  Top 0.305: U$4.57 336.3,92.06 336.91,92
  Top 0.508: IC2.11 307.16,89.11 308.81,90.08 311.07,90.05 v311.76,90.56 | v316.2,95.99 316.46,95.99 318.21,97.75 331.24,97.75 v331.88,97.11 | v337.62,93.1 337.8,92.62 337.67,92.34 337.54,92.21 336.91,92
  Bottom 0.508: v311.76,90.56 311.76,93.35 315.52,95.81 316.03,95.81 v316.2,95.99 | v331.88,97.11 331.88,96.7 333.4,95.18 335.1,95.18 337.36,93.33 v337.62,93.1
I2CSCL_FOR_GYRO  (via drill 0.41)
  Top 0.305: U1.23 366.32,90.76 | U$4.41 343.36,96.6 | R31.1 358.53,79.78 359.16,80.4 359.89,80.4 360.22,80.73 360.22,80.98 v360.3,81.54 | v361.67,92.94 361.65,92.92 361.49,92.64 361.49,92.06 361.39,91.95
  Top 0.508: 366.32,90.76 365.12,91.95 361.39,91.95 360.5,91.95 357.63,94.82 351.84,94.82 348.59,98.08 344.02,98.08 343.36,96.6
  Bottom 0.305: v360.3,81.54 360.27,84.77 360.4,85.02 360.4,87.97 361.77,89.21 362.53,89.29 362.71,89.67 362.71,92.62 362.43,92.89 v361.67,92.94
I2CSDA_FOR_GYRO  (via drill 0.41)
  Top 0.305: U1.24 365.4,90.68 | U$4.40 343.69,96.12 343.94,96.2 | R30.1 359.42,73.68 v358.55,74.56 | v364.11,90.56 364.52,90.53 365.04,91.05
  Top 0.508: 365.4,90.68 365.04,91.05 364.82,91.29 359.97,91.27 357.15,94.09 351.59,94.11 348.11,97.36 344.5,97.36 343.94,96.2
  Bottom 0.305: v358.55,74.56 358.55,76.99 359.46,77.91 360.99,77.91 362.46,79.38 362.46,80.98 362.97,81.49 362.97,84.84 362.46,85.35 362.46,87.33 362.61,87.53 363.04,87.97 363.04,88.55 363.09,88.75 363.22,90.05 363.7,90.51 v364.11,90.56
L_DIGITAL_IN_1  (via drill 0.41)
  Top 0.305: IC2.2 317.27,95.46 317.96,96.15 331.34,96.15 331.7,95.79 331.83,95.48 v332.03,95.36 | v337.21,91.17 336.02,91.24 335.84,91.24 U$4.59
  Bottom 0.305: v332.03,95.36 335.03,93.53 335.61,93.53 336.98,92.28 337.44,92.16 337.67,91.83 337.67,91.6 v337.21,91.17
L_DIGITAL_IN_2  (via drill 0.41)
  Top 0.305: IC2.9 308.38,92.1 308.99,91.5 312.27,91.5 v312.85,91.47 | v316.54,89.21 329.19,89.06 329.77,90.3 330.3,90.28 v330.07,90.33 | v332.69,91.6 333.25,91.4 U$4.61
  Bottom 0.305: v312.85,91.47 315.85,89.36 v316.54,89.21 | v332.69,91.6 331.32,90.25 v330.07,90.33
LED/R5
  Top 1.524: R5.2 374.02,82.22 U$15.-
LED/R7
  Top 1.524: R7.2 363.7,114.9 U$16.-
LED/R11  (via drill 1.63)
  Top 1.524: R11.2 372.82,98.99 v373.2,98.61
  Bottom 1.524: U$18.- 378.61,93.22 378.61,94.77 377.14,96.25 377.14,97.19 375.72,98.61 v373.2,98.61
LED/R14
  Top 1.524: U$19.- 364.74,68.15 R14.2
LEFT_BACK  (via drill 1.63)
  Top 0.508: 311.33,96.2 310.01,96.2 309.68,95.87 309.68,93.82 IC2.8
  Top 1.524: v312.45,96.78 311.91,96.78 311.33,96.2
  Bottom 1.524: U$8.L_MOTOR_A 327.26,95.78 325.32,97.72 313.39,97.72 v312.45,96.78
LEFT_FORWARD
  Top 0.305: 316.31,93.52 IC2.3
  Top 0.762: 316.31,91.7 316.31,93.52
  Top 1.524: U$8.L_MOTOR_B 323.76,90.53 317.78,90.53 316.31,91.7
  Bottom 1.524: 324.61,91.34 U$8.L_MOTOR_B
MGND  (via drill 0.41, 0.6, 1.63)
  Top 0.305: IC2.15 312.24,82.58 v312.37,82.45 | IC2.16 313.51,82.48 v313.56,82.43
  Top 0.508: IC2.17 314.88,84.52 | 314.88,97.03 314.82,96.97 arc45 314.73,96.76 IC2.4 | v324.14,103.32 326.25,103.32 v328.17,101.4 328.17,101.33 v329.62,99.88 | v324.14,103.32 324.14,103.37 v322.71,104.81 | v324.14,103.32 324.3,103.32 v325.78,101.84 325.96,101.84 v327.99,99.8
  Top 1.016: IC2.17 314.73,84.67
  Top 1.524: M_SPLITTER.2 314.17,64.95 314.17,65.49 316.72,68.04 U$8.R_GND 318.85,66.74 v318.85,65.66 | v316.71,81.44 315.52,81.44 314.88,82.07 | 314.88,97.03 314.88,97.29 arc-45 314.97,97.5 316.97,99.5 320.07,99.5 arc45 320.28,99.59 324.02,103.32 v324.14,103.32 320.59,103.32 v320.42,103.49
  Bottom 0.305: v312.37,82.45 312.37,81.82 312.98,81.21 316.74,81.21 316.84,81.31 316.31,81.84 314,81.84 313.56,82.28 v313.56,82.43
  Bottom 1.524: 321.89,81.41 316.84,81.31 v316.71,81.44
  pour Bottom (rank 2, no thermals): 314.96,126.63 341.48,126.63 341.48,51.82 314.96,51.82
  pour Top (no thermals): 307.59,101.61 307.59,96.96 310.39,96.96 310.39,80.63 307.57,80.63 311.68,77.1 318.85,72.75 318.85,80.73 315.37,80.73 315.37,97.19 318.24,97.19 318.24,101.61
N$1
  Top 0.305: RESISTOR.1 357.98,65.63 358.27,65.92 358.27,66.92 U$17.A
N$2  (via drill 0.41)
  Top 0.305: R8.2 349.96,55.51 351.54,57.08 351.54,58.72 R2.1 351.65,58.76 v354.15,58.76 | C24.2 361.83,114.98 v361.42,114.56
  Bottom 0.305: v361.42,114.56 361.42,113.95 361.8,113.57 362.81,113.57 367.94,118.7 371.63,118.7 379.91,110.19 380.06,106.51 384.12,102.44 384.12,95.38 385.29,94.22 385.29,80.63 384.58,79.91 384.58,77.93 384.51,77.86 384.51,77.17 384.35,77.02 384.18,76.71 383.67,75.98 383.67,75.19 382.8,74.33 382.88,73.34 382.27,72.22 382.12,71.89 381.05,70.49 380.82,69.68 377.39,65.94 376.5,65.94 368.94,58.38 362.13,58.38 361.75,58.76 v354.15,58.76
N$3
  pour Top: 330.3,98.79 349.66,99.29 349.71,81.44 330.3,81.11
N$13  (via drill 0.41)
  Top 0.305: U$4.46 341.07,97.57 342.22,97.77 342.52,98.03 v342.93,98.71 | v341.2,105.01 341.48,105.29 343.41,105.29 344.07,104.63 JP1.1
  Bottom 0.305: v341.2,105.01 341.1,104.91 341.1,104.27 341.35,104.02 341.35,103.41 342.88,101.89 342.88,101.12 342.42,100.67 342.42,100.16 342.93,99.65 v342.93,98.71
N$14  (via drill 0.41)
  Top 0.305: JP1.2 341.81,107.17 341.33,106.69 v341.05,106.69 | U$4.49 336.25,96.73 336.09,96.83 335.1,96.83 334.77,96.55 v334.49,96.55
  Bottom 0.305: v341.05,106.69 340.31,106.69 338.28,103.23 337.74,102.52 334.95,99.57 334.26,96.86 v334.49,96.55
N$16  (via drill 0.41)
  Top 0.305: U$4.30 347.47,89.57 347.98,89.13 349.2,89.08 v349.33,88.93 | v349.45,85.12 350.32,84.46 C26.1
  Bottom 0.305: v349.33,88.93 349.58,88.42 349.58,85.27 v349.45,85.12
NRST_CIRCUIT_MCU  (via drill 0.41)
  Top 0.305: RESETBUTTON.1 363.6,57.1 363.6,55.84 362.99,55.23 361.44,55.23 360.83,54.62 356.9,54.62 355.57,53.3 346.61,53.3 345.86,54.04 R8.1 345.11,56.26 345.11,64.5 347.65,67.04 347.65,68.87 v347.09,69.45 | v334.65,83.6 335.53,84.51 335.74,84.51 336.45,84.64 U$4.7
  Bottom 0.305: v347.09,69.45 334.98,81.46 v334.65,83.6
PA_6_REC_CIRCUIT_2  (via drill 0.41, 0.6)
  Top 0.305: v343.76,89.47 343.51,87.2 343.69,87.03 U$4.22 | v356.26,99.35 360.02,99.35 360.73,100.06 360.78,100.08 v360.94,100.23 | v373.94,106 373.94,104.24 R3.2
  Top 1.524: U$9.E 377.47,103.82 376.91,104.38 374.08,104.38 R3.2 373.95,104.25
  Bottom 0.305: v356.26,99.35 356.13,99.22 354.86,99.22 354.53,98.89 353.57,98.89 353.31,99.14 352.55,99.14 351.79,98.38 351.23,98.38 349.91,97.06 349.91,96.27 349.17,95.54 348.49,95.51 348.28,95.31 348.28,94.85 347.88,94.44 347.32,94.44 345.08,91.9 344.4,91.8 343.71,91.06 343.69,90.56 v343.76,89.47 | v360.94,100.23 360.71,110.98 361.75,112.02 371.88,112.02 372.92,110.98 372.92,107.07 373.94,106.05 v373.94,106
PA_7_REC_CIRCUIT_1  (via drill 0.41, 0.6)
  Top 0.305: v346.48,86.19 345.92,86.42 U$4.23 | v356.31,113.34 357.18,114.2 357.18,117.79 359.33,119.94 359.33,122.26 359.84,122.76 364.87,122.76 365.56,122.08 365.89,122.08 368.08,119.89 U$6.E | v358.9,81.49 358.9,80.98 358.6,80.68 358.01,80.68 357.66,81.03 357.66,81.36 357.51,81.52 357.1,81.52 355.19,79.61 355.19,77.27 354.41,76.49 350.34,76.49 349.1,75.24 v348.16,75.24
  Top 0.508: 346.57,68.17 R1.2 346.18,68.34 346.18,69.81 347.07,70.69 v347.07,70.9 347.07,70.64
  Bottom 0.305: 357.44,92.14 357.58,95.23 359.59,97.97 359.51,104.76 358.73,105.67 357.78,105.97 356.41,107.07 356.29,107.45 356.31,107.47 v356.31,113.34 | 357.44,92.14 357.45,91.9 | v348.16,75.24 348.08,75.24 347.71,75.61 | v358.9,81.49 357.3,83.39 357.45,92 357.44,92.14
  Bottom 0.508: v347.07,70.9 347.07,72.88 346.51,73.44 346.51,74.81 347.14,75.44 347.55,75.44 347.71,75.61 348.34,76.23 348.34,83.55 347.22,84.66 347.22,84.82 346.97,85.07 346.97,85.86 v346.48,86.19
PB13_EMIT_CIRCUIT_1  (via drill 0.41)
  Top 0.305: Q1.1 369.15,75.68 368.45,76.38 366.54,76.38 R6.2 364.45,75.66 v363.6,74.81 | U$4.34 345.34,92.82 345.16,92.03 v344.6,90.99 | v354.41,73.03 354.41,73.21 353.52,74.05 352.78,74.78 v352.27,74.78 | v359.33,68.71 360.17,67.88 361.06,67.88 362.92,69.73 362.92,71.48 363.65,72.22 v363.65,73.16
  Bottom 0.305: v354.41,73.03 354.89,72.55 357.76,72.55 359.33,70.97 v359.33,68.71 | v363.65,73.16 363.6,73.21 v363.6,74.81 | v344.6,90.99 344.17,90.76 344.17,90.51 344.43,90.25 344.65,90.25 345.59,91.19 345.59,91.29 345.64,91.29 346.18,91.83 348.03,93.22 350.47,91.95 351.08,91.5 351.18,90.12 351.08,79.08 351.79,77.73 351.79,75.27 v352.27,74.78
PB14_EMIT_CIRCUIT_2  (via drill 0.41)
  Top 0.305: R10.2 355.44,115.16 v354.97,114.69 | v346.66,96.15 346.36,95.41 345.87,94.93 U$4.35
  Top 0.508: Q2.1 358.23,119.99 R10.2
  Bottom 0.305: v354.97,114.69 348.79,114.69 346.91,112.81 346.91,104.32 348.72,102.52 348.72,101.28 346.41,98.97 346.41,96.47 v346.66,96.15
PB_0_EMIT_CIRCUIT_3  (via drill 0.41)
  Top 0.305: R13.2 359.32,87.52 v358.52,88.32 357.91,88.93 352.68,88.93 351.18,87.25 347.35,87.28 U$4.26 | v360.83,97.24 360.94,97.24 361.47,97.77 362.61,97.77 Q3.1
  Bottom 0.305: v358.52,88.32 358.52,94.93 v360.83,97.24
PB_1_EMIT_CIRCUIT_4  (via drill 0.41)
  Top 0.305: Q5.1 368.71,80.83 366.65,80.83 366.23,80.41 R15.2 363.41,80.68 v361.75,80.5 | U$4.27 347.47,87.76 350.85,87.74 352.4,89.54 359.46,89.54 361.04,87.81 v361.09,87.1
  Bottom 0.305: v361.09,87.1 361.06,81.23 v361.75,80.5
PC4_REC_CIRCUIT_3  (via drill 0.41, 0.6, 0.61)
  Top 0.305: U$4.24 346.05,86.9 346.63,87.1 347.22,86.77 351.59,86.77 352.86,88.07 354.58,88.07 355.47,87.18 v358.37,87.18 | v361.42,79.43 362.1,78.85 362.1,77.55 362.13,77.53 v362.13,77.5 | v373.1,72.73 374.93,72.73 v375.97,73.77
  Top 0.508: U$11.E 378.74,83.5 379.99,84.74 380.11,84.74 385.93,90.56 385.93,94.32 384.43,95.81 383.95,102.04 382.12,104.15 382.12,105.39 380.98,106.53 v376.63,106.53 | v366.68,109.2 369.34,106.53 373.05,106.53 v373.89,107.37 | v363.75,110.04 363.27,110.04 362.97,109.73 362.97,109.68 363.78,108.87 363.78,107.94 R4.2
  Bottom 0.305: v358.37,87.18 359.59,85.96 359.59,80.25 360.38,79.46 361.34,79.46 v361.42,79.43 | v362.13,77.5 364.36,75.27 364.36,73.34 364.97,72.73 v373.1,72.73 | U$11.E 377.63,79.33 376.23,77.93 376.23,74.96 375.97,74.71 v375.97,73.77
  Bottom 0.508: v366.68,109.2 364.59,109.2 v363.75,110.04 | v373.89,107.37 374.73,107.37 375.59,106.51 376.61,106.51 v376.63,106.53
PC5_REC_CIRCUIT_4  (via drill 0.6, 0.61)
  Top 0.305: U$4.25 344.6,88.25 344.55,89.11
  Top 0.508: 350,94.63 349.63,94.7 348.87,94.7 345.75,91.62 345.75,90.99 345.52,90.76 345.52,90.63 344.75,89.87 344.75,89.31 344.55,89.11 | 350,94.63 351.49,93.1 351.16,90.38 v350.34,89.41 | R12.2 361.63,110.46 359.94,108.77 355.93,108.77 v355.42,108.24 | 350,94.63 349.62,94.63 v349.15,94.16 | v356.39,98.15 356.54,98.15 357.05,98.61 358.42,98.66 v358.7,98.51 | v348.84,67.65 348.84,66.99 349.15,66.68 349.48,66.68 350.37,65.79 350.37,62.26 348.84,60.74 348.84,57.77 v349.53,57.08 | v359.67,57.87 361.52,59.72 364.49,59.72 365.96,61.2 365.96,61.78 366.6,62.41 366.6,62.86 U$13.E
  Bottom 0.508: v350.34,89.41 350.22,85.68 350.24,85.15 350.24,80.78 349.71,79.58 349.76,71.74 350.01,71.3 350.01,68.81 v348.84,67.65 | v349.15,94.16 349.15,94.34 351.16,96.35 351.16,97.11 351.56,97.52 351.79,97.52 352.35,98.08 356.29,98.08 v356.39,98.15 | v355.42,108.24 355.45,107.91 355.45,106.99 358.95,104.43 358.95,99.04 v358.7,98.51 | v359.67,57.87 358.88,57.08 v349.53,57.08
PC6_TX_PIN  (via drill 0.41)
  Top 0.305: U$4.37 344.02,93.58 343.69,92.51 343.05,92.18 v342.7,92.49 | v341.94,111.31 342.85,112.22 344.5,112.22 JP1.4
  Bottom 0.305: v342.7,92.49 342.77,94.65 343.89,95.76 343.89,96.15 344.25,96.5 344.25,101.58 341.94,103.89 v341.94,111.31
PC7_RX_PIN  (via drill 0.41)
  Top 0.305: U$4.38 v344.96,96.47
  Bottom 0.305: JP1.5 342.98,114.79 342.47,114.28 342.47,113.72 342.62,113.57 342.62,110.88 342.47,110.72 342.47,104.07 344.7,101.84 344.7,96.93 344.86,96.78 344.91,96.37 v344.96,96.47
R_DIGITAL_IN_1  (via drill 0.41)
  Top 0.305: IC2.19 317.32,83.4 317.91,82.81 v323.55,82.81 | v337.29,87.76 340.77,87.71 342.75,89.85 v342.85,89.9 | U$4.43 341.4,95.05 v341.68,93.2 | v334.06,84.49 332.28,82.81 v328.7,82.81
  Bottom 0.305: v337.29,87.76 334.24,85.33 334.24,84.77 v334.06,84.49 | v341.68,93.2 341.63,93.2 341.25,92.82 341.25,91.24 341.68,90.81 342.88,90.81 343.13,90.56 343.13,90.2 v342.85,89.9 | v323.55,82.81 v328.7,82.81
R_DIGITAL_IN_2  (via drill 0.41)
  Top 0.305: U$4.44 340.67,94.67 340.67,92.84 340.41,92.59 339.78,92.59 338.48,93.88 338.48,96.25 338.15,96.58 337.9,96.58 336.04,98.43 333.65,98.43 333.22,98 332.36,98 331.73,98.63 322.83,98.63 v322.2,99.27 | v308.31,87.48 308.31,84.71 IC2.12
  Bottom 0.305: v322.2,99.27 311.38,99.27 311.02,99.9 308.76,99.9 308.03,98.91 308.03,98.28 308.64,97.14 308.81,87.99 v308.31,87.48
RED_LED  (via drill 0.41, 0.6)
  Top 0.305: U$4.8 336.65,83.95 336.07,83.83 335.66,83.42 v335.51,83.01 | 339.17,79.14 v339.17,79.43 339.85,78.75 v340.92,78.72 | v347.75,73.79 346.38,73.79 v342.95,77.42 | U$17.R 352.2,66.98 v352.07,67.11 | v350.24,67.65 v348.84,69.04
  Bottom 0.305: v339.17,79.43 339.17,80.09 337.01,82.12 336.17,82.15 335.61,82.66 v335.51,83.01 | v347.75,73.79 347.78,73.79 347.98,73.59 347.98,69.91 v348.84,69.04 | v340.92,78.72 340.82,78.69 341.81,77.7 342.67,77.7 arc-90 v342.95,77.42 | v352.07,67.11 350.77,67.11 v350.24,67.65
RIGHT_BACK
  Top 0.305: 309.7,82.68 310.06,82.3
  Top 0.813: IC2.13 309.7,82.68
  Top 1.524: U$8.R_MOTOR_B 327.26,82.79 325.25,79.89 321.26,79.91 321.08,79.74 318.39,79.74 317.88,79.23 310.24,79.23 310.24,81.74 310.06,82.3
RIGHT_FORWARD
  Top 0.508: 316.23,84.81 IC2.18
  Top 0.762: 316.23,86.62 316.23,84.81
  Top 1.524: U$8.R_MOTOR_A 316.85,87.24 316.23,86.62
TO_C5_CAP
  Top 0.508: U$5.NR/FB 312.04,70.41 312.04,68.76 311.35,68.08 C5.1
TO_Q1_MOS
  Top 1.524: R5.1 374.02,75.01 373.76,74.76 371.41,74.76 Q1.3
TO_Q2_MOS  (via drill 0.6)
  Top 0.508: Q2.3 355.6,122.38 354.92,121.7 354.92,120.81 v355.27,120.45 | v359.74,118.95 360.58,118.95 360.96,119.33 360.96,121.09 R7.1
  Bottom 0.508: v355.27,120.45 356.72,120.45 357.66,119.51 359.18,119.51 v359.74,118.95
TO_Q3_MOS
  Top 0.305: Q3.3 364.31,100.62 368.25,100.62 368.81,101.17 R11.1
TO_Q5_MOS
  Top 0.508: R14.1 368.88,70.82 370.18,72.02 370.18,76.89 371.27,78.09 371.27,79.41 Q5.3
TO_R18/C25  (via drill 0.41)
  Top 0.305: R23.1 353.73,70.25 v354.23,70.95 | v354.41,78.47 354.53,79.13 354.2,79.41 353.07,79.41 C25.1 352.83,81.34 v352.22,81.95 | v354.81,96.96 355.1,97.25 R18.2
  Bottom 0.305: v354.41,78.47 354.2,78.01 354.2,74.96 353.7,74.45 353.7,72.57 354.23,72.04 v354.23,70.95 | v354.81,96.96 351.64,92.89 351.66,83.52 352.22,82.61 v352.22,81.95
TO_R19/C28  (via drill 0.41, 0.6)
  Top 0.305: R24.1 360.42,65.53 v360.27,66.22 | C28.1 361.18,76.38 359.84,76.38 359.59,76.13 v359.59,75.75 358.04,75.75 v357.28,76.51 | R19.2 356.3,91.87 355.52,92.64 355.5,92.64 v355.47,92.62
  Bottom 0.305: v360.27,66.22 360.17,75.04 v359.59,75.75 | v355.47,92.62 355.04,92.62 354.81,92.39 354.81,91.78 356.03,90.56 356.03,88.7 355.78,88.45 355.78,78.95 356.06,78.67 356.85,78.67 357.3,78.21 v357.28,76.51
TO_R20/C27
  Top 0.406: R21.1 345.92,123.02 345.92,120.33 346.56,119.69 348.21,119.69 348.65,119.25 | 348.65,119.25 348.77,119.13 348.77,118.08 R20.2 | C27.1 351.22,121.03 349.86,119.67 349.07,119.67 348.65,119.25
TO_R22/C29  (via drill 0.41, 0.6)
  Top 0.305: R25.1 353.3,64.31 v354.84,65.77 | v356.59,71.74 356.59,73.6 R22.2 | 353.34,63.62 R25.1 | C29.1 346.97,59.14 v347.27,58.83 | v353.31,60.23 353.31,63.64 R25.1
  Bottom 0.305: v347.27,58.83 351.92,58.83 v353.31,60.23 | v354.84,65.77 356.59,67.52 v356.59,71.74
VOLTAGE_BATTERY_1
  Top 0.305: U$4.16 341.25,83.14 341.58,79.13 341.9,76.04 R26.2 341.96,74.66 342.88,75.57 343.54,75.57 345.01,74.1 345.01,72.92 R28.1
VOLTAGE_BATTERY_2  (via drill 0.6, 0.61)
  Top 0.305: R27.1 342.14,71.85 | U$4.17 343.57,83.82
  Top 0.508: R29.2 338.9,65.7 v338.46,65.26 | v342.14,69.73 342.14,71.85 | 343.57,83.82 345.67,81.72 346.38,81.36 v347.42,80.75 | v343.64,74.28 342.23,72.81 R27.1
  Bottom 0.305: 341.94,69.53 v342.14,69.73 | 343.84,74.5 343.84,74.43 v343.64,74.28
  Bottom 0.508: v338.46,65.26 337.77,65.26 337.31,65.72 337.31,66.25 337.82,66.76 339.12,66.76 340.64,68.28 340.64,69.17 341,69.53 341.94,69.53 | v347.42,80.75 347.42,76.82 346,75.39 344.73,75.39 343.84,74.5

## Text on the board
tNames: RX | TX | DGND | SWCLK | SWDIO
bNames: Sahil Gandhi / Kyle Liang / Vansh Gandhi / MacroRat